# EAGLE board Pedestrian crossing (EAGLE 7.6.0)

Size 73.58 x 63.39 mm. Coordinates in mm from the lower left corner, seen from the top.
Outline: 0,0 56.82,0 56.82,53.33 0,53.33 0,0
Copper layers (1*16): Top 0.035mm / dielectric 1.5mm / Bottom 0.035mm
Design rules "default": minimum track width 10mil, minimum drill 24mil, track to track 8mil, track to pad 8mil, pad to pad 8mil, via to via 8mil, smd to smd 8mil, copper to edge 40mil, drill to drill 8mil, minimum pad ring 10mil, minimum via ring 8mil, stop-mask expansion 4mil, vias tented up to drill 0mil, thermal gap 10mil

## Footprints (pad centres in the part's own frame; a part is rotated, then mirrored left to right if it is on the bottom)
LED5MM = drill 0.813 octagon: A -1.27,0; K 1.27,0
0207/10 = drill 0.813 octagon: 1 -5.08,0; 2 5.08,0
TL1105 = drill 1 pad 1.676: 1 -2.25,3.25; 2 2.25,3.25; 3 -2.25,-3.25; 4 2.25,-3.25
ARDUINO_UNO = drill 1.016 pad 1.88: 0 63.5,50.8; 1 60.96,50.8; 2 58.42,50.8; 3 55.88,50.8; 3.3V 35.56,2.54; 4 53.34,50.8; 5 50.8,50.8; 5V 38.1,2.54; 6 48.26,50.8; 7 45.72,50.8; 8 41.656,50.8; 9 39.116,50.8; 10 36.576,50.8; 11 34.036,50.8; 12 31.496,50.8; 13 28.956,50.8; A0 50.8,2.54; A1 53.34,2.54; A2 55.88,2.54; A3 58.42,2.54; A4 60.96,2.54; A5 63.5,2.54; AREF 23.876,50.8; GND 26.416,50.8; GND. 43.18,2.54; GND.. 40.64,2.54; I/OREF 30.48,2.54; N/C 27.94,2.54; RESET 33.02,2.54; SCL 18.796,50.8; SDA 21.336,50.8; VIN 45.72,2.54 | hole 3.2: 66.04,7.62; 66.04,35.56; 15.24,50.8; 13.97,2.54

## Placement (x,y rotation side)
DPedestrian Traffic Ligth Green  [LED5MM]  5,111.68 0 top  (outside the outline)
DPedestrian Traffic Ligth Red  [LED5MM]  5,98.98 0 top  (outside the outline)
DTraffic Light Green  [LED5MM]  5,86.28 0 top  (outside the outline)
DTraffic Light Red  [LED5MM]  5,22.78 0 top
DTraffic Light Yellow  [LED5MM]  5,73.58 0 top  (outside the outline)
RR1  100â€ŽÎ©  [0207/10]  5,48.18 0 top
RR2  100â€ŽÎ©  [0207/10]  5,35.48 0 top
RR3  100â€ŽÎ©  [0207/10]  5,60.88 0 top
RR4  1kâ€ŽÎ©  [0207/10]  5,162.48 0 top  (outside the outline)
RR5  100â€ŽÎ©  [0207/10]  5,124.38 0 top  (outside the outline)
RR6  100â€ŽÎ©  [0207/10]  5,137.08 0 top  (outside the outline)
S1  [TL1105]  5,149.78 0 top  (outside the outline)
U1  [ARDUINO_UNO]  5,10.08 0 top

## Library data of the parts
DPedestrian Traffic Ligth Green DPedestrian Traffic Ligth Red DTraffic Light Green DTraffic Light Red DTraffic Light Yellow RR1-RR6 S1 U1 = AUTODESK_CIRCUITS_BREADBOARD

## Nets
N$1: DTraffic Light Red.K RR3.2
N$2: DTraffic Light Red.A U1.2
N$3: DTraffic Light Yellow.K RR2.2
N$4: DTraffic Light Yellow.A U1.1
N$5: DTraffic Light Green.K RR1.2
N$6: DTraffic Light Green.A U1.0
N$7: DPedestrian Traffic Ligth Green.K RR5.1
N$8: DPedestrian Traffic Ligth Green.A U1.3
N$9: DPedestrian Traffic Ligth Red.K RR6.1
N$10: DPedestrian Traffic Ligth Red.A U1.4
N$11: RR1.1 RR2.1 RR3.1 RR4.2 RR5.2 RR6.2 U1.GND
N$12: S1.2 U1.5V
N$13: RR4.1 S1.1 U1.5

## Tracks (layer width: path | path; a pad name or v marks a point on that pad's centre or on a via)
N$1  (1 unrouted)
N$2  (1 unrouted)
N$3  (1 unrouted)
N$4  (1 unrouted)
N$5  (1 unrouted)
N$6  (1 unrouted)
N$7  (1 unrouted)
N$8  (1 unrouted)
N$9  (1 unrouted)
N$10  (1 unrouted)
N$11  (6 unrouted)
N$12  (1 unrouted)
N$13  (2 unrouted)